# EAGLE board Alimentatore_LM317_1 (EAGLE 9.5.0)
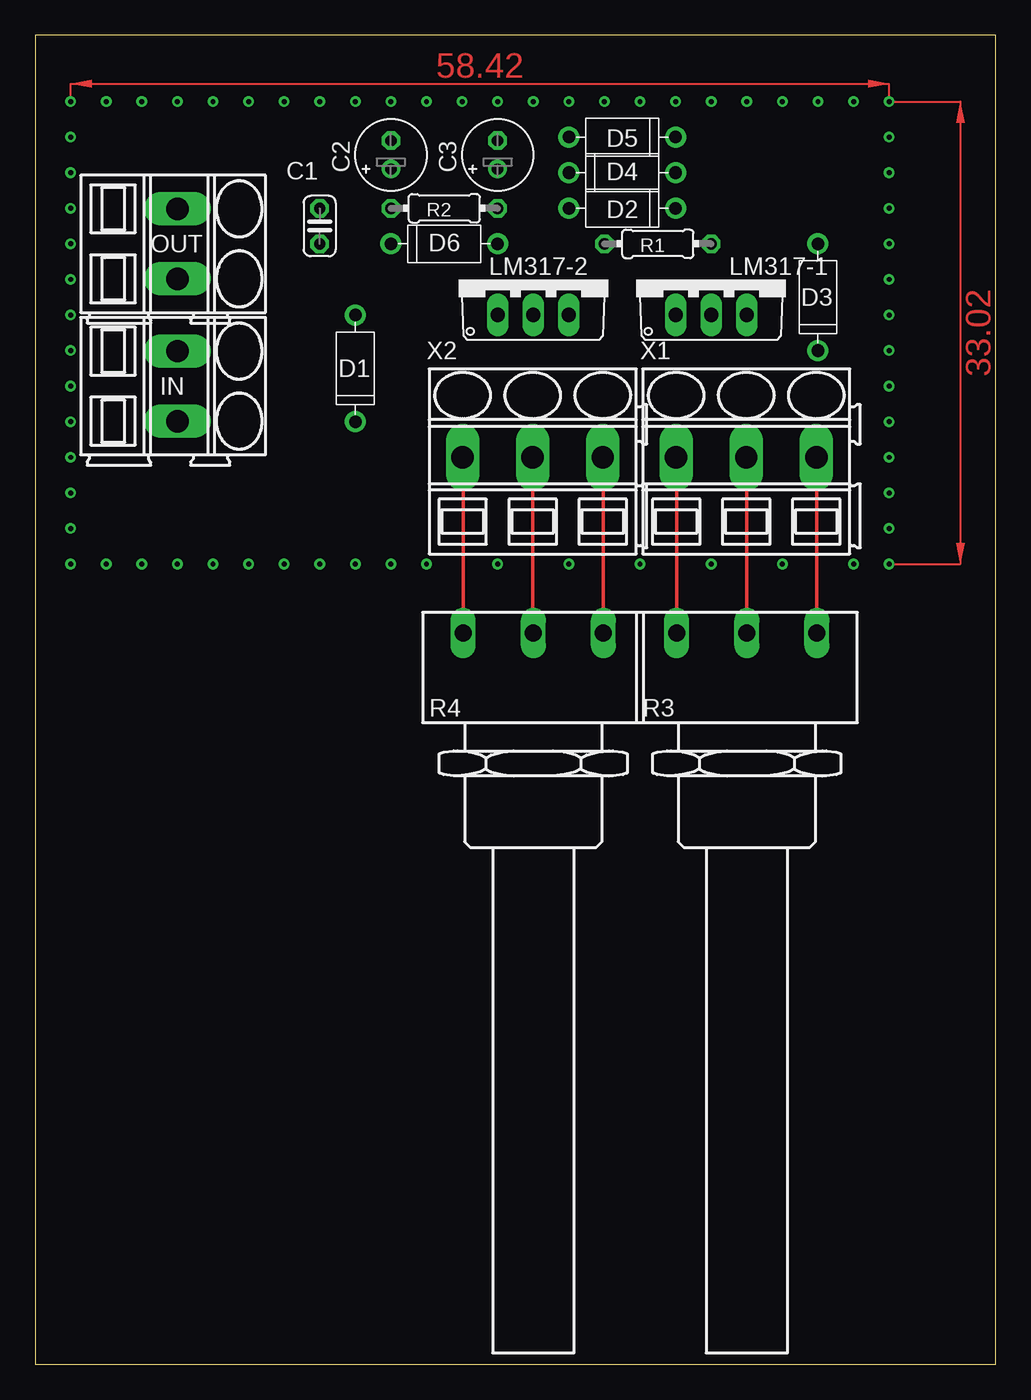
[diagram p0: board, top side]
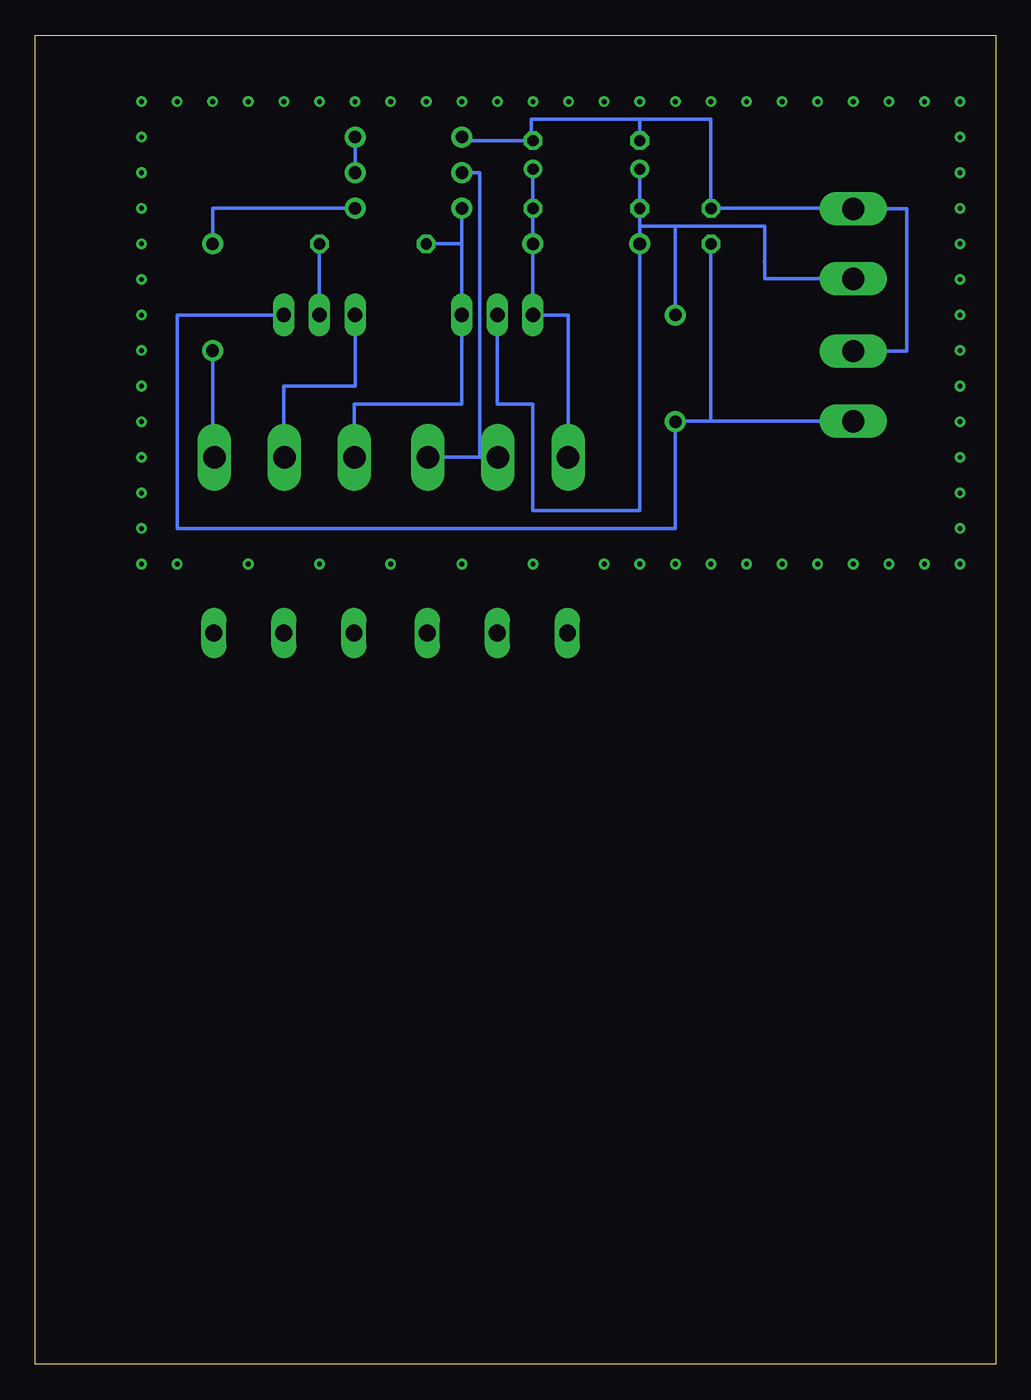
[diagram p1: board, bottom side, seen from below]

Size 68.56 x 94.92 mm. Coordinates in mm from the lower left corner, seen from the top.
Outline: 0,0 68.56,0 68.56,94.92 0,94.92 0,0
Copper layers (1*16): Top 0.035mm / dielectric 1.5mm / Bottom 0.035mm
Design rules "default": minimum track width 6mil, minimum drill 0.35mm, track to track 6mil, track to pad 6mil, pad to pad 6mil, via to via 6mil, smd to smd 6mil, copper to edge 40mil, drill to drill 6mil, minimum pad ring 10mil, minimum via ring 8mil, stop-mask expansion 4mil, vias tented up to drill 0mil, thermal gap 10mil

## Footprints (pad centres in the part's own frame; a part is rotated, then mirrored left to right if it is on the bottom)
C025-024X044 = drill 0.813 octagon: 1 -1.27,0; 2 1.27,0
E2-5 = drill 0.813 pad 1.27: + -1.016,0 | drill 0.813 pad 1.27 octagon: - 1.016,0
DIOAD860W70L460D235B = drill 0.9 pad 1.5: 1 -3.81,0; 2 3.81,0
SMKDSP_1,5/2 = drill 1.6 pad 1.8 long: 1 -2.5,0; 2 2.5,0
TO220V = drill 1.016 long: 1 -2.54,-2.54; 2 0,-2.54; 3 2.54,-2.54
0204/7 = drill 0.813 octagon: 1 -3.81,0; 2 3.81,0
PC16S = drill 1.2 long: 1A -5,6.5; 1E 5,6.5; 1S 0,6.5
SMKDSP_1,5/3 = drill 1.6 pad 1.8 long: 1 -2.5,0; 2 2.5,0; 3 7.5,0

## Placement (x,y rotation side)
C1  0.1uF  [C025-024X044]  20.32,81.28 90 top
C2  10uF Tant.  [E2-5]  25.4,86.36 90 top
C3  10uF  [E2-5]  33.02,86.36 90 top
D1  1N4002  [DIOAD860W70L460D235B]  22.86,71.12 90 top
D2  1N4001  [DIOAD860W70L460D235B]  41.91,82.55 180 top
D3  1N4001  [DIOAD860W70L460D235B]  55.88,76.2 90 top
D4  1N4001  [DIOAD860W70L460D235B]  41.91,85.09 0 top
D5  1N4001  [DIOAD860W70L460D235B]  41.91,87.63 180 top
D6  1N4001  [DIOAD860W70L460D235B]  29.21,80.01 0 top
IN  [SMKDSP_1,5/2]  10.16,69.85 270 top
LM317-1  [TO220V]  48.26,77.47 0 top
LM317-2  [TO220V]  35.56,77.47 0 top
OUT  [SMKDSP_1,5/2]  10.16,80.01 270 top
R1  [0204/7]  44.45,80.01 0 top
R2  240  [0204/7]  29.21,82.55 0 top
R3  1k  [PC16S]  50.8,45.72 0 top
R4  5k  [PC16S]  35.56,45.72 0 top
X1  SMKDSP_1,5/3  [SMKDSP_1,5/3]  48.26,64.77 0 top
X2  SMKDSP_1,5/3  [SMKDSP_1,5/3]  33.02,64.77 0 top

## Library data of the parts
C1-C3 = rcl; SPICEPREFIX: C
D1-D6 = diode_MOD
IN OUT = con-phoenix-smkdsp; MF: FARNELL; MPN: 1733570; OC_FARNELL: 3041244; OC_NEWARK: 69C8588
LM317-1 LM317-2 = v-reg
R1 R2 = rcl; SPICEPREFIX: R
R3 R4 = piher; OC_FARNELL: 4452940; OC_NEWARK: unknown
X1 X2 = con-phoenix-smkdsp; MF: FARNELL; MPN: 1733583; OC_FARNELL: 3041256; OC_NEWARK: 71C4130

## Nets
GND: C1.2 C2.- C3.- D5.2 IN.1 OUT.1
N$1: C2.+ D1.2 D6.1 LM317-2.2 OUT.2 R2.1
N$2: LM317-1.2 R1.2
N$3: D2.2 LM317-2.3 R1.1 R3.1A X1.1
N$4: D2.1 D3.2
N$5: LM317-1.1 R3.1S X1.2
N$6: D4.2 D5.1
N$7: D3.1 R3.1E X1.3
N$9: C3.+ D6.2 LM317-2.1 R2.2 R4.1A X2.1
N$10: D4.1 R4.1E R4.1S X2.2 X2.3
VCC: C1.1 D1.1 IN.2 LM317-1.3

## Tracks (layer width: path | path; a pad name or v marks a point on that pad's centre or on a via)
GND
  Bottom 0.254: 20.32,82.65 C1.2 | C1.2 10.2,82.55 OUT.1 6.35,82.51 6.35,72.35 IN.1 | C1.2 20.32,88.9 25.4,88.9 | 25.4,88.9 33.14,88.9 33.14,87.55 C3.- 37.61,87.38 D5.2 | C2.- 25.4,88.9
N$1
  Bottom 0.254: OUT.2 16.47,77.51 16.47,78.78 | 16.51,78.74 16.47,78.78 | 16.47,78.78 16.47,81.28 22.86,81.28 | 22.86,81.28 D1.2 | R2.1 25.4,81.28 22.86,81.28 | R2.1 C2.+ | LM317-2.2 35.56,68.58 33.02,68.58 33.02,60.96 25.4,60.96 D6.1 R2.1
N$2
  Bottom 0.254: LM317-1.2 R1.2
N$3
  Top 0.254: X1.1 45.8,64.73 R3.1A
  Bottom 0.254: 38.1,80.01 LM317-2.3 38.1,68.58 45.76,68.58 X1.1 | 38.1,80.01 R1.1 | D2.2 38.1,80.01
N$4
  Bottom 0.254: D2.1 55.88,82.55 D3.2
N$5
  Top 0.254: R3.1S 50.8,64.77 X1.2
  Bottom 0.254: LM317-1.1 45.72,69.85 50.8,69.85 50.8,64.77 X1.2
N$6
  Bottom 0.254: D5.1 D4.2
N$7
  Top 0.254: X1.3 55.8,64.73 R3.1E
  Bottom 0.254: D3.1 55.88,64.77 X1.3
N$9
  Top 0.254: R4.1A 30.56,64.77 X2.1
  Bottom 0.254: C3.+ R2.2 D6.2 LM317-2.1 30.52,74.93 X2.1
N$10
  Top 0.254: R4.1E 40.56,64.77 X2.3 | R4.1S 35.52,52.22 X2.2
  Bottom 0.254: X2.2 36.83,64.77 | 36.83,64.77 X2.3 | D4.1 36.83,85.09 36.83,64.77
N$99  (via drill 0.35)
  other vias: 15.24,90.17
N$100  (via drill 0.35)
  other vias: 12.7,90.17
N$101  (via drill 0.35)
  other vias: 10.16,90.17
N$102  (via drill 0.35)
  other vias: 7.62,90.17
N$103  (via drill 0.35)
  other vias: 5.08,90.17
N$104  (via drill 0.35)
  other vias: 17.78,90.17
N$105  (via drill 0.35)
  other vias: 20.32,90.17
N$106  (via drill 0.35)
  other vias: 22.86,90.17
N$107  (via drill 0.35)
  other vias: 25.4,90.17
N$108  (via drill 0.35)
  other vias: 27.94,90.17
N$109  (via drill 0.35)
  other vias: 30.48,90.17
N$110  (via drill 0.35)
  other vias: 33.02,90.17
N$111  (via drill 0.35)
  other vias: 35.56,90.17
N$112  (via drill 0.35)
  other vias: 38.1,90.17
N$113  (via drill 0.35)
  other vias: 40.64,90.17
N$114  (via drill 0.35)
  other vias: 43.18,90.17
N$115  (via drill 0.35)
  other vias: 45.72,90.17
N$116  (via drill 0.35)
  other vias: 48.26,90.17
N$142  (via drill 0.35)
  other vias: 60.96,69.85
N$143  (via drill 0.35)
  other vias: 60.96,67.31
N$144  (via drill 0.35)
  other vias: 60.96,64.77
N$145  (via drill 0.35)
  other vias: 60.96,62.23
N$146  (via drill 0.35)
  other vias: 60.96,59.69
N$147  (via drill 0.35)
  other vias: 60.96,57.15
N$148  (via drill 0.35)
  other vias: 58.42,57.15
N$150  (via drill 0.35)
  other vias: 53.34,57.15
N$151  (via drill 0.35)
  other vias: 48.26,57.15
N$153  (via drill 0.35)
  other vias: 43.18,57.15
N$155  (via drill 0.35)
  other vias: 38.1,57.15
N$157  (via drill 0.35)
  other vias: 33.02,57.15
N$159  (via drill 0.35)
  other vias: 27.94,57.15
N$160  (via drill 0.35)
  other vias: 25.4,57.15
N$161  (via drill 0.35)
  other vias: 22.86,57.15
N$162  (via drill 0.35)
  other vias: 20.32,57.15
N$163  (via drill 0.35)
  other vias: 17.78,57.15
N$164  (via drill 0.35)
  other vias: 15.24,57.15
N$165  (via drill 0.35)
  other vias: 12.7,57.15
N$166  (via drill 0.35)
  other vias: 10.16,57.15
N$167  (via drill 0.35)
  other vias: 7.62,57.15
N$168  (via drill 0.35)
  other vias: 5.08,57.15
N$176  (via drill 0.35)
  other vias: 60.96,72.39
N$177  (via drill 0.35)
  other vias: 60.96,74.93
N$178  (via drill 0.35)
  other vias: 60.96,77.47
N$179  (via drill 0.35)
  other vias: 60.96,80.01
N$180  (via drill 0.35)
  other vias: 60.96,82.55
N$181  (via drill 0.35)
  other vias: 60.96,85.09
N$182  (via drill 0.35)
  other vias: 60.96,87.63
N$183  (via drill 0.35)
  other vias: 60.96,90.17
N$184  (via drill 0.35)
  other vias: 58.42,90.17
N$185  (via drill 0.35)
  other vias: 55.88,90.17
N$186  (via drill 0.35)
  other vias: 53.34,90.17
N$187  (via drill 0.35)
  other vias: 50.8,90.17
S$1  (via drill 0.35)
  other vias: 2.54,90.17
S$2  (via drill 0.35)
  other vias: 2.54,87.63
S$3  (via drill 0.35)
  other vias: 2.54,85.09
S$4  (via drill 0.35)
  other vias: 2.54,82.55
S$5  (via drill 0.35)
  other vias: 2.54,80.01
S$6  (via drill 0.35)
  other vias: 2.54,77.47
S$7  (via drill 0.35)
  other vias: 2.54,74.93
S$8  (via drill 0.35)
  other vias: 2.54,72.39
S$9  (via drill 0.35)
  other vias: 2.54,69.85
S$10  (via drill 0.35)
  other vias: 2.54,67.31
S$11  (via drill 0.35)
  other vias: 2.54,64.77
S$12  (via drill 0.35)
  other vias: 2.54,62.23
S$13  (via drill 0.35)
  other vias: 2.54,59.69
S$14  (via drill 0.35)
  other vias: 2.54,57.15
VCC
  Bottom 0.254: 50.75,74.98 LM317-1.3 58.42,74.93 58.42,59.69 22.86,59.69 D1.1 22.86,67.35 20.32,67.35 | IN.2 20.32,67.35 | C1.1 20.32,67.35
(copper drawn outside any net)
  shapes: Top area x2